# Altium PCB Copy of EV76C661_Motherboard.PcbDoc
Units mil, origin at the board's own origin, x right, y up, seen from the top; angles counter-clockwise.
Board outline 16800 x 9950 mil, 2 copper layers (Top Layer, Bottom Layer); 16 components, 26 nets, 147 pads, 6 vias.
Unrouted connection lines stored in the file: 44.
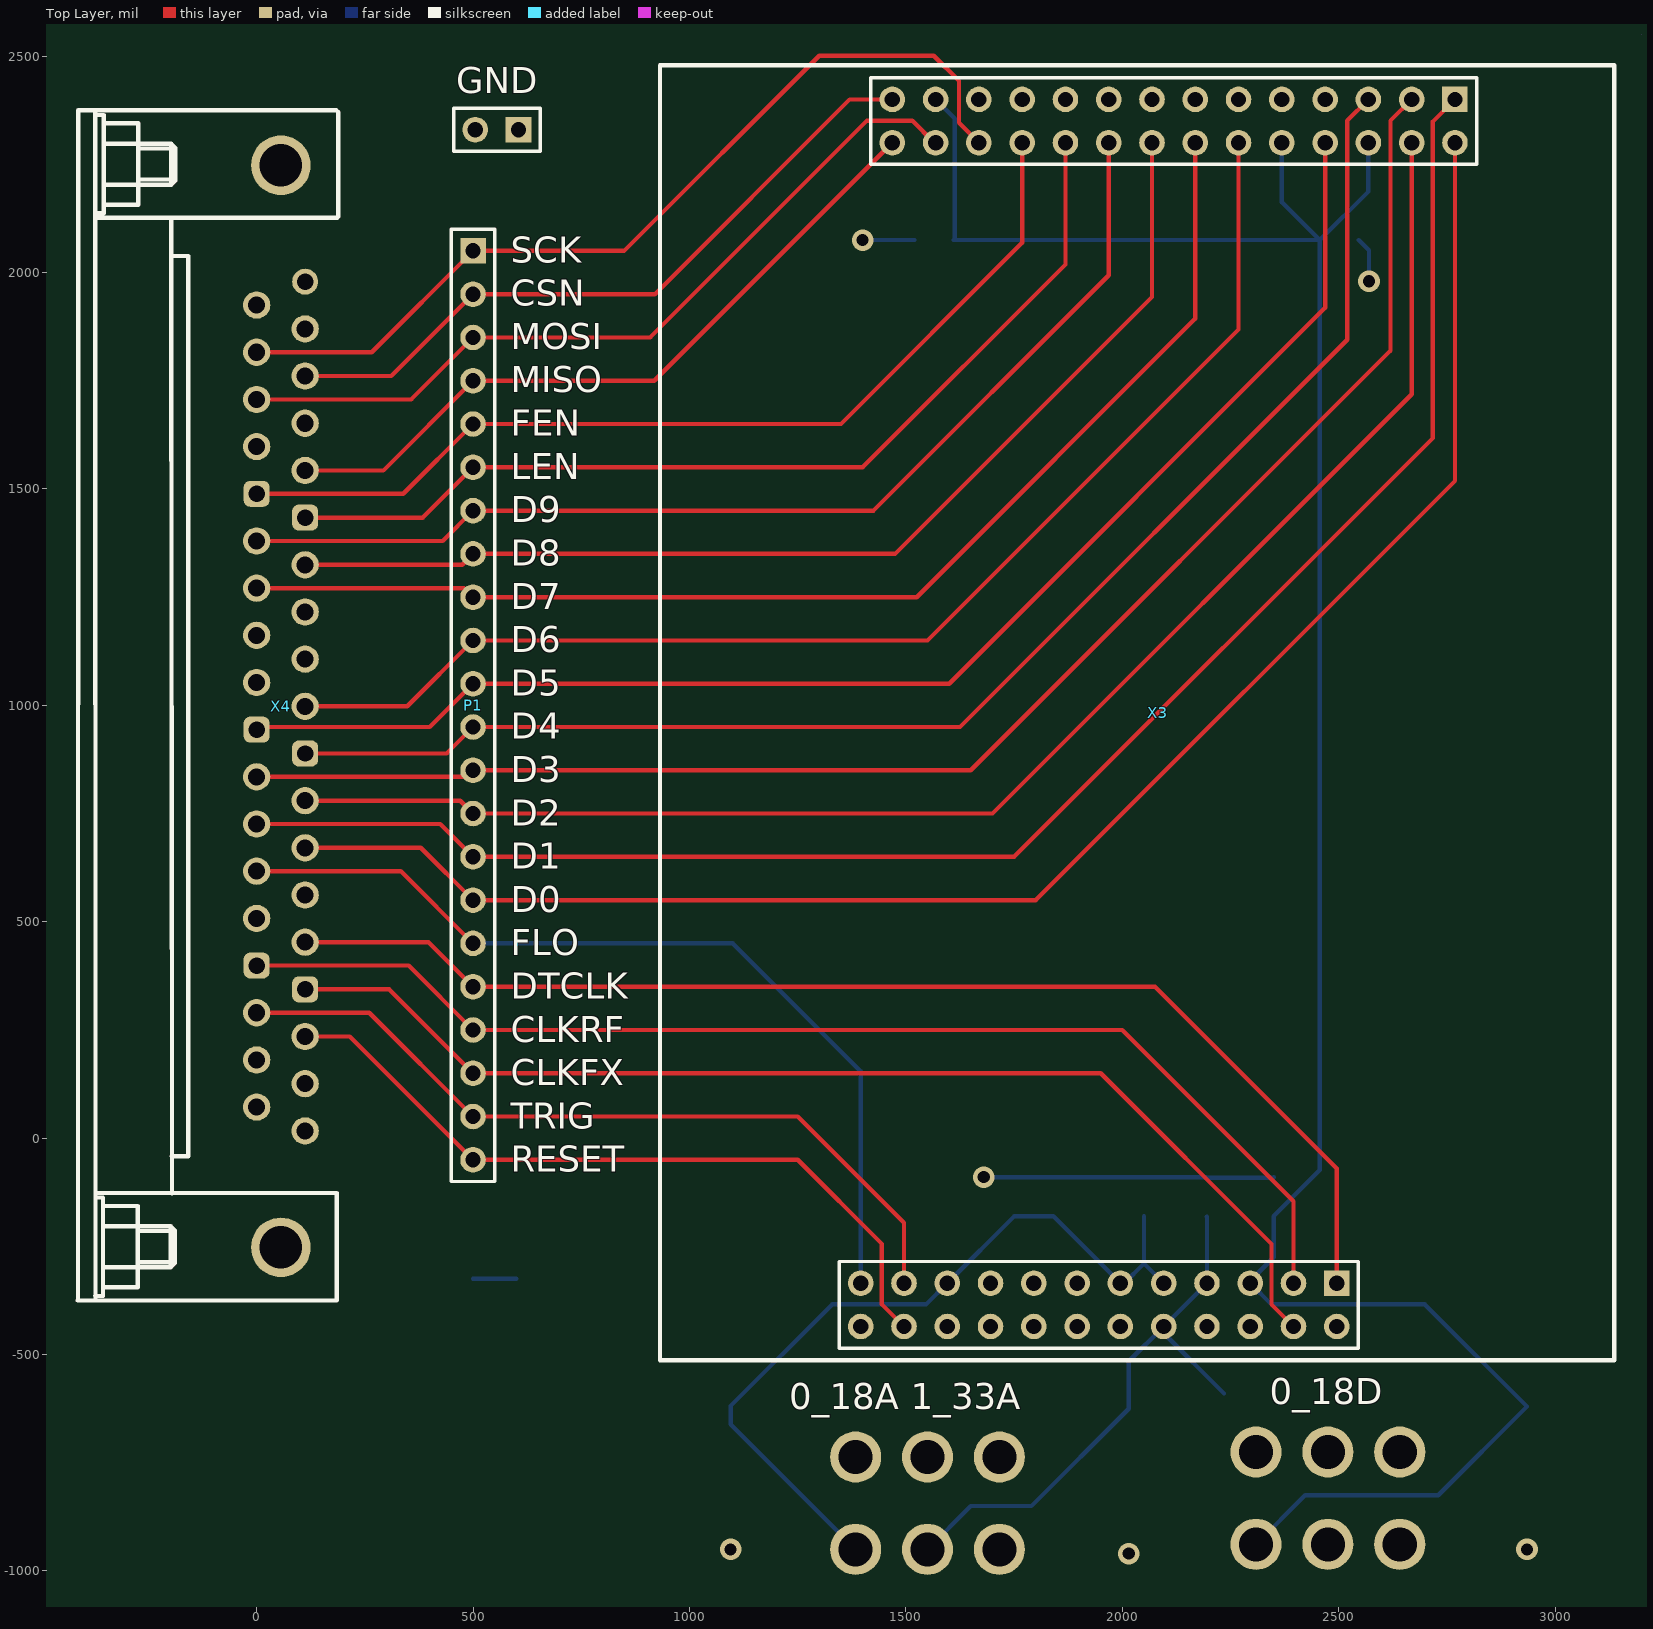
[diagram p0: Top Layer view]
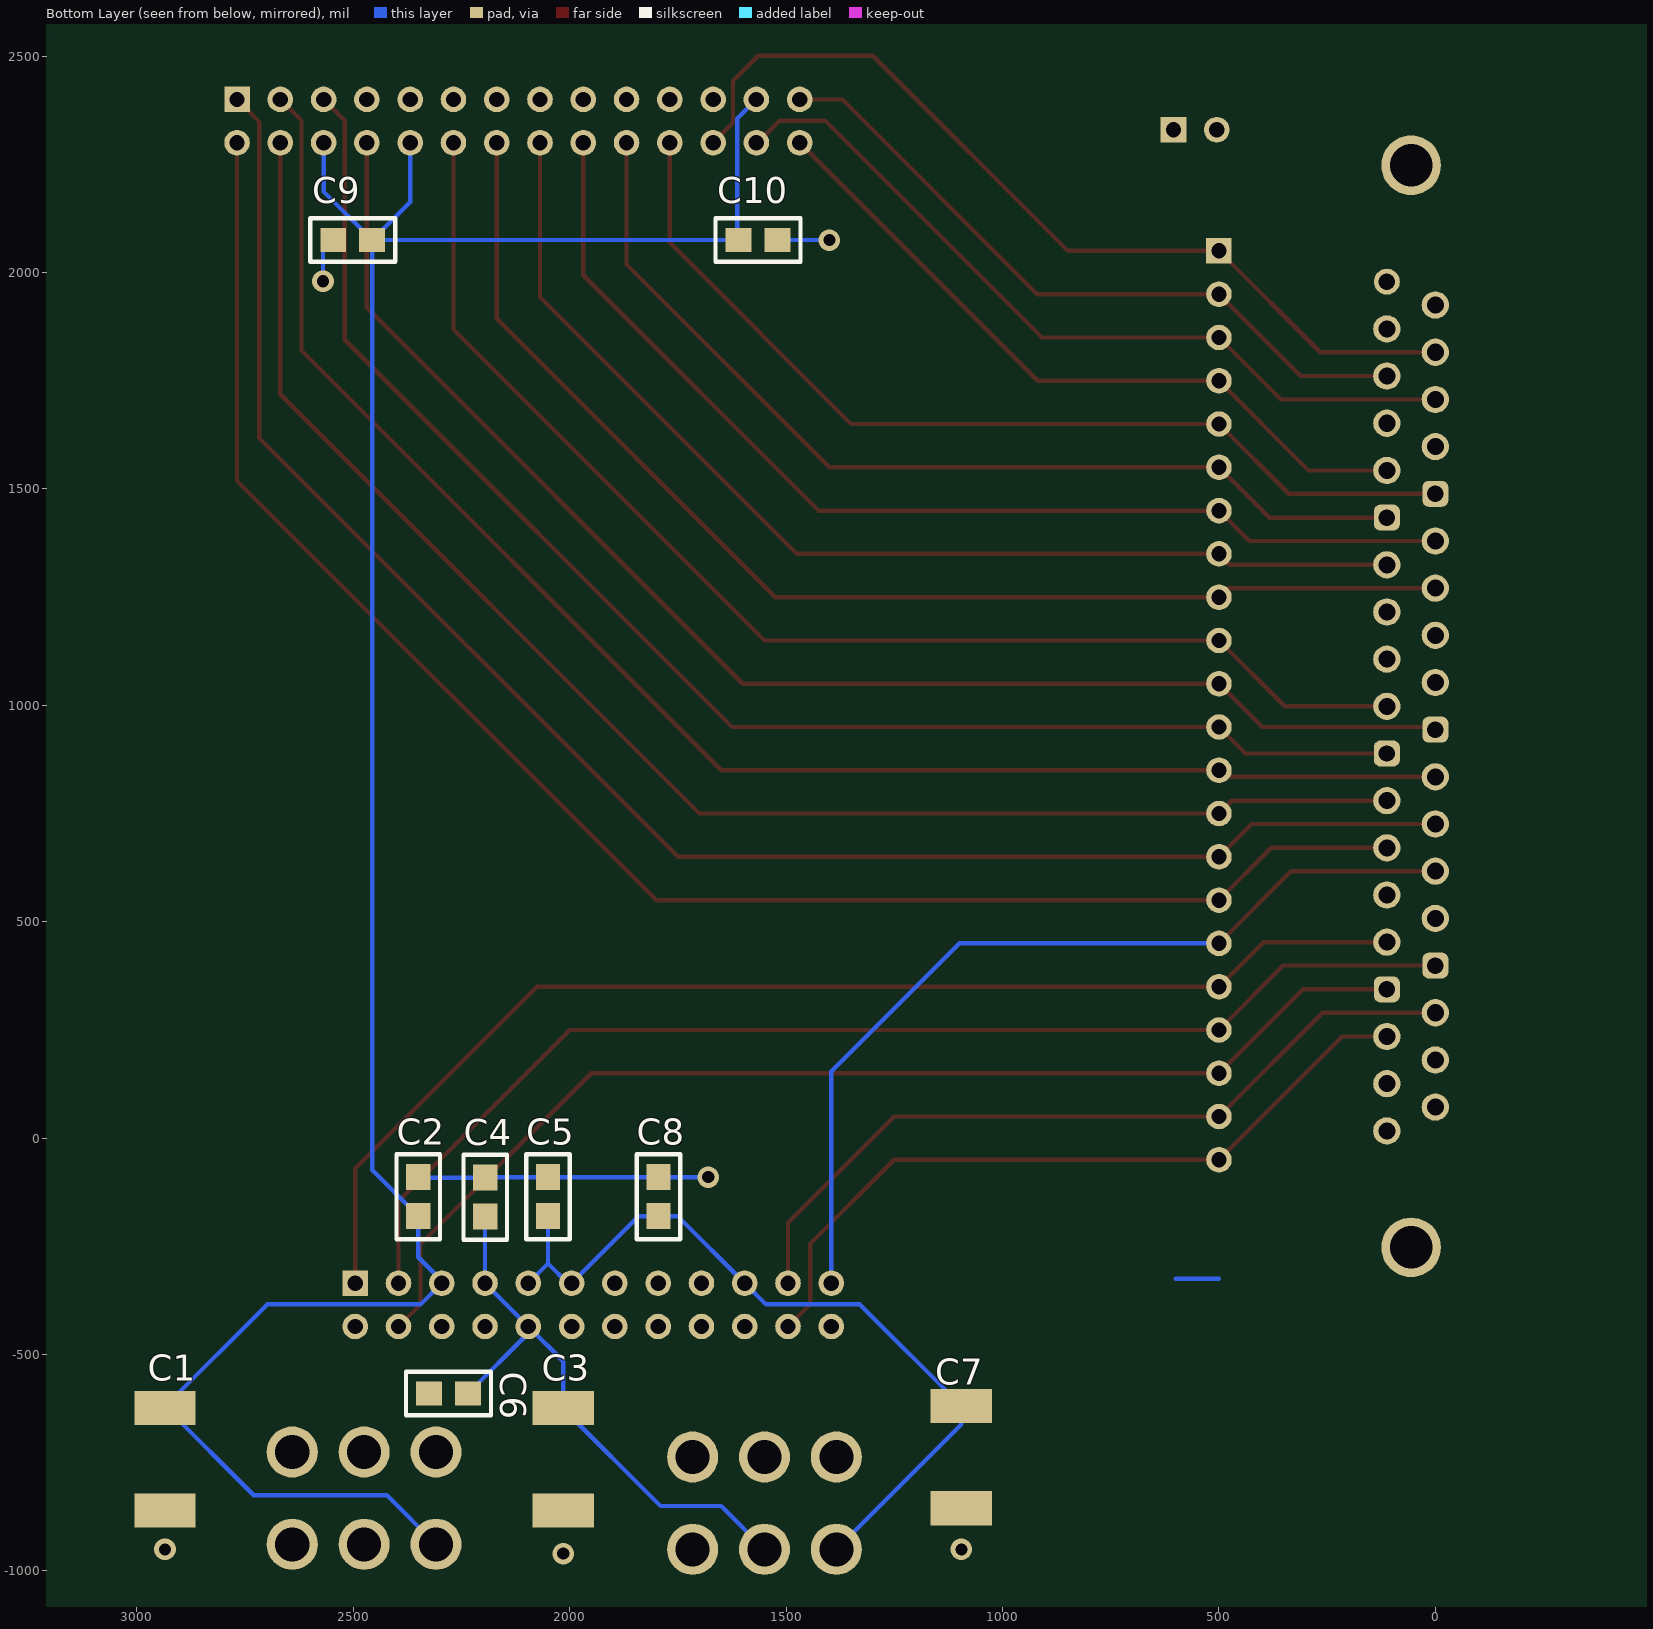
[diagram p1: Bottom Layer view, seen from below]

## Layer stack, top to bottom
Top Solder: solder mask 0.4, Solder Resist, Dk 3.5
Top Layer: signal copper 1.4
Dielectric 1: dielectric 12.6, FR-4, Dk 4.8
Bottom Layer: signal copper 1.4
Bottom Solder: solder mask 0.4, Solder Resist, Dk 3.5

## Board outline
-6750.39,-5179 10049.61,-5179 10049.61,4771 9999.61,4721 -6700.39,4721 -6750.39,4671
cut-out: 3200,2550

## Design rules (kind name [scope] priority, off if disabled: settings)
Clearance [All] p1: gap=10 ignorepadtopadclearanceinfootprint=FALSE except(0: Arc-Hole Track-Hole SMDPad-Hole THPad-Hole Via-Hole Fill-Hole Poly-Hole Region-Hole Text-Hole)
PolygonConnect [All] p1: connectstyle=Relief reliefconductorwidth=10 reliefentries=4 polygonreliefangle="90 Angle" airgapwidth=10
RoutingVias [All] p1: holewidth=28 width=50 viastyle="Through Hole" minholewidth=28 minwidth=50 maxholewidth=28 maxwidth=50
SolderMaskExpansion [All] p1: expansion=4
Width [All] p1: maxlimit=10 minlimit=10 preferedwidth=10
30 further rules are at their usual default settings.

## Components (designator, comment, footprint, x,y, rotation, side; value= is the part's Value field where it differs from the comment)
"0_18A 1_33A" "POWER" POWER 1550,-650 r180 top (schematic designator X1)
0_18D "POWER" POWER 2475,-638.48 r180 top (schematic designator X2)
C1 "10uF" Cap_BIG 2860,-580.78 r0 bottom
C2 "100nF" CAP_SMALL 2300,-233.71 r90 bottom
C3 "10uF" Cap_BIG 1940,-580.78 r0 bottom
C4 "100nF" CAP_SMALL 2145,-235 r90 bottom
C5 "100nF" CAP_SMALL 2100,-36.29 r270 bottom
C6 "100nF" CAP_SMALL 2181.29,-540 r0 bottom
C7 "10uF" Cap_BIG 1020,-575.78 r0 bottom
C8 "100nF" CAP_SMALL 1745,-233.71 r90 bottom
C9 "100nF" CAP_SMALL 2600,2025 r180 bottom
C10 "100nF" CAP_SMALL 1466.29,2125 r0 bottom
GND "Header 2" HDR1X2 605,2330 r180 top (schematic designator P3)
P1 "Header 22" HDR1X22 500,2050 r270 top
X3 "EV76_MEZ" EV76C661_MEZONINE 2495.61,-435 r90 top
X4 "CHEAP_CON_37_FEMALE" CHEAP_CONN_FEMALE 56,-252.18 r90 top

## Footprints (in the part's own frame and the unit in brackets; to place one, negate y for a bottom-side part, rotate by r counter-clockwise, add the part's x,y. Pads: shape width x height; smd on the part's side, far side on the other; paste and mask are expansions set on the pad)
Cap_BIG [mm] "FROM_MAX"
  rect 3.6x2 smd: 1(1.905,7.092) 2(1.905,1.092)
  body extent 0,-0.01 3.81,8.19, height 2.54
CAP_SMALL [mil] "FROM_MAX"
  rect 60x55.98 smd: 1(53.71,50) 2(143.71,50)
  silkscreen extent 1,0 197,100, body extent 20,18 178,82, height 100
CHEAP_CONN_FEMALE [mm] "CHEAP_CONN_FEMALE"
  round 1.6 hole 1: 1(6.833,-1.422) 2(9.601,-1.422) 3(12.37,-1.422) 5(17.907,-1.422) 6(20.676,-1.422) 7(23.444,-1.422) 8(26.213,-1.422) 10(31.75,-1.422) 11(34.519,-1.422) 12(37.287,-1.422) 13(40.056,-1.422) 15(45.593,-1.422) 16(48.362,-1.422) 17(51.13,-1.422) 18(53.899,-1.422) 20(8.23,1.422) 21(10.998,1.422) 22(13.767,1.422) 24(19.304,1.422) 25(22.073,1.422) 26(24.841,1.422) 27(27.61,1.422) 29(33.147,1.422) 30(35.916,1.422) 31(38.684,1.422) 32(41.453,1.422) 34(46.99,1.422) 35(49.759,1.422) 36(52.527,1.422) 37(55.296,1.422)
  rrect50% 1.524x1.524 hole 0.965: 4(15.138,-1.422) 9(28.981,-1.422) 14(42.824,-1.422) 23(16.535,1.422) 28(30.378,1.422) 33(44.221,1.422)
  round 1.524 hole 0.965: 19(56.667,-1.422)
  round 3.5 hole 2.5: 38(0,0) 39(63.5,0)
  silkscreen extent -3.11,-3.36 66.72,11.92
EV76C661_MEZONINE [mm]
  rect 1.5x1.5 hole 0.9: 1(2.54,0) 25(72.009,-6.934)
  round 1.5 hole 0.9: 2(0,0) 3(2.54,2.54) 4(0,2.54) 5(2.54,5.08) 6(0,5.08) 7(2.54,7.62) 8(0,7.62) 9(2.54,10.16) 10(0,10.16) 11(2.54,12.7) 12(0,12.7) 13(2.54,15.24) 14(0,15.24) 15(2.54,17.78) 16(0,17.78) 17(2.54,20.32) 18(0,20.32) 19(2.54,22.86) 20(0,22.86) 21(2.54,25.4) 22(0,25.4) 23(2.54,27.94) 24(0,27.94) 26(72.009,-4.394) 27(72.009,-1.854) 28(72.009,0.686) 29(72.009,3.226) 30(72.009,5.766) 31(72.009,8.306) 32(72.009,10.846) 33(72.009,13.386) 34(72.009,15.926) 35(72.009,18.466) 36(72.009,21.006) 37(72.009,23.546) 38(72.009,26.086) 39(69.469,-6.934) 40(69.469,-4.394) 41(69.469,-1.854) 42(69.469,0.686) 43(69.469,3.226) 44(69.469,5.766) 45(69.469,8.306) 46(69.469,10.846) 47(69.469,13.386) 48(69.469,15.926) 49(69.469,18.466) 50(69.469,21.006) 51(69.469,23.546) 52(69.469,26.086)
  silkscreen extent -1.99,-16.28 74.01,39.72
HDR1X2 [mm] "Connector; Header; 2 Position"
  rect 1.5x1.5 hole 0.9: 1(0,0)
  round 1.5 hole 0.9: 2(2.54,0)
  silkscreen extent -1.27,-1.27 3.81,1.27
HDR1X22 [mm] "Connector; Header; 22 Position"
  rect 1.5x1.5 hole 0.9: 1(0,0)
  round 1.5 hole 0.9: 2(2.54,0) 3(5.08,0) 4(7.62,0) 5(10.16,0) 6(12.7,0) 7(15.24,0) 8(17.78,0) 9(20.32,0) 10(22.86,0) 11(25.4,0) 12(27.94,0) 13(30.48,0) 14(33.02,0) 15(35.56,0) 16(38.1,0) 17(40.64,0) 18(43.18,0) 19(45.72,0) 20(48.26,0) 21(50.8,0) 22(53.34,0)
  silkscreen extent -1.27,-1.27 54.61,1.27
POWER [mm] "POWER"
  round 3 hole 2: 1(4.217,7.62) 2(0,7.62) 3(-4.217,7.62) 4(4.217,2.198) 5(0,2.198) 6(-4.217,2.198)

## Part data
C1 C3 C7: library part CAP_BIG
C2 C4 C5 C6 C8 C9 C10: library part CAP_SMALL
GND: "Header, 2-Pin", LatestRevisionDate=17-Jul-2002, LatestRevisionNote="Re-released for DXP Platform.", Publisher="Altium Limited"
P1: "Header, 22-Pin", LatestRevisionDate=17-Jul-2002, LatestRevisionNote="Re-released for DXP Platform.", Publisher="Altium Limited"
X3: library part EV76C661_MEZ

## Via types
v1: diameter 50, hole 28, Top Layer to Bottom Layer, 6 vias

## Nets (pads, with @x,y where several pads share a name; then routed paths per layer and width w, separated by ;. In a path a pad name is that pad's centre, name@x,y a point inside that pad or via, vN(x,y) a via of type N, cw(c..) or ccw(c..) an arc to the next point about the centre after c; other vN are vias at no path point)
CLKFIX: P1.20 X3.4 X4.4 | length 2687.9
  Top Layer w10: X4.4 306.18,343.82 P1.20 1950,150 2344.61,-244.61 2344.61,-384 X3.4
CLKREF: P1.19 X3.3 X4.23 | length 2810.5
  Top Layer w10: X4.23 351.18,398.82 P1.19 2000,250 2395.61,-145.61 X3.3
CSN: P1.2 X3.38 X4.17 | length 1621.4
  Top Layer w10: X4.17 310.82,1760.82 P1.2 920,1950 1370,2400 X3.38
D0: P1.16 X3.39 X4.7 | length 3889.3
  Top Layer w10: X4.7 379.18,670.82 P1.16 1800,550 2768.61,1518.61 X3.39
D1: P1.15 X3.25 X4.26 | length 3953.3
  Top Layer w10: X4.26 424.18,725.82 P1.15 1750,650 2717.61,1617.61 2717.61,2349 X3.25
D2: P1.14 X3.40 X4.8 | length 3551.6
  Top Layer w10: X4.8 470.18,779.82 P1.14 1700,750 2668.61,1718.61 X3.40
D3: P1.13 X3.26 X4.27 | length 3628.2
  Top Layer w10: X4.27 484.82,834.82 P1.13 1650,850 2619.61,1819.61 2619.61,2351 X3.26
D4: P1.12 X3.27 X4.9 | length 3379.2
  Top Layer w10: X4.9 438.82,888.82 P1.12 1625,950 2519.61,1844.61 2519.61,2351 X3.27
D5: P1.11 X3.42 X4.28 | length 3253.8
  Top Layer w10: X4.28 6.18,950 400,950 P1.11 1600,1050 2468.61,1918.61 X3.42
D6: P1.10 X3.44 X4.10 | length 2948.7
  Top Layer w10: X4.10 347.82,997.82 P1.10 1550,1150 2268.61,1868.61 X3.44
D7: P1.9 X3.45 X4.31 | length 2850.2
  Top Layer w10: X4.31 479.18,1270.82 P1.9 1525,1250 2168.61,1893.61 X3.45
D8: P1.8 X3.46 X4.13 | length 2569.3
  Top Layer w10: X4.13 474.82,1324.82 P1.8 1475,1350 2068.61,1943.61 X3.46
D9: P1.7 X3.47 X4.32 | length 2529.2
  Top Layer w10: X4.32 429.82,1379.82 P1.7 1425,1450 1968.61,1993.61 X3.47
DATACLK: P1.18 X3.1 X4.5 | length 2865.2
  Top Layer w10: X4.5 397.18,452.82 P1.18 2075.61,350 2495.61,-70 X3.1
FEN: P1.5 X3.49 X4.33 | length 2240.2
  Top Layer w10: X4.33 338.82,1488.82 P1.5 1350,1650 1768.61,2068.61 X3.49
FLO: P1.17 X3.23 X4.25 | length 2076.5
  Top Layer w10: X4.25 333.18,616.82 P1.17
  Bottom Layer w10: P1.17 1100,450 1395.61,154.39 X3.23
GND: 0_18D.4 0_18D.5 0_18D.6 "0_18A 1_33A.4" "0_18A 1_33A.5" "0_18A 1_33A.6" C1.1 C2.2 C3.1 C4.2 C5.1 C6.2 C7.1 C8.2 C9.1 C10.1 GND.1 GND.2 X3.2 X3.6 X3.8 X3.12 X3.13 X3.14 X3.15 X3.16 X3.17 X3.18 X3.20 X3.24 X3.28 X3.29 X3.30 X3.31 X3.32 X3.33 X3.34 X3.35 X3.36 X4.6 X4.11 X4.16 X4.24 X4.29 X4.34 X4.38 X4.39 | length 995.9
  Bottom Layer w10: 500,-325 600,-325 ; v1(1400,2075) C10.1 ; v1(1680,-90) C8.2 C5.1 2193.71,-90 C4.2 2348.71,-91.29 C2.2 ; C9.1 2570,2051.29 v1(2570,1980)
LEN: P1.6 X3.48 X4.14 | length 2280.2
  Top Layer w10: X4.14 383.82,1433.82 P1.6 1400,1550 1868.61,2018.61 X3.48
MISO: P1.4 X3.52 X4.15 | length 1685.2
  Top Layer w10: X4.15 292.82,1542.82 P1.4 918.61,1750 X3.52 X3.52@1453.61,2300
MOSI: P1.3 X3.51 X4.35 | length 1856.6
  Top Layer w10: X4.35 356.82,1706.82 P1.3 909,1850 1410,2351 1514.61,2351 1565.61,2300 X3.51
RESET: P1.22 X3.22 X4.3 | length 1742.7
  Top Layer w10: X4.3 215.18,234.82 P1.22 1250,-50 1444.61,-244.61 1444.61,-384 X3.22
SCK: P1.1 X3.50 X4.36 | length 2092.5
  Top Layer w10: X4.36 265.82,1815.82 P1.1 848.61,2050 1299.61,2501 1564.61,2501 1622.61,2443 1622.61,2346 X3.50
TRIG: P1.21 X3.21 X4.22 | length 1836.1
  Top Layer w10: X4.22 260.18,289.82 P1.21 1250,50 1495.61,-195.61 X3.21
VDD1: 0_18D.1 C1.2 C2.1 C9.2 C10.2 X3.5 X3.37 X3.41 X3.43 | length 5715.8
  Bottom Layer w10: X3.37 1613.13,2355.47 1613.13,2078.13 C10.2 C9.2 ; 0_18D.1 2422.44,-825 2730,-825 2935,-620 2699,-384 2344.61,-384 X3.5 2295.61,-329.39 2350,-275 C2.1 2456.29,-73.71 C9.2 ; X3.43 2368.61,2162.68 C9.2 ; X3.41 2568.61,2187.32 C9.2
VDD2: "0_18A 1_33A.2" C3.2 C4.1 C6.1 X3.7 X3.10 | length 1331.1
  Bottom Layer w10: 1550,-950 1650,-850 1790,-850 2015,-625 2015,-515.61 X3.10 ; C4.1 2195.61,-181.9 X3.7 X3.10 ; C6.1 2095.61,-450.61 X3.10
VDD3: "0_18A 1_33A.1" C5.2 C7.2 C8.1 X3.9 X3.11 X3.19 | length 1844.6
  Bottom Layer w10: 1383.96,-950 1095,-661.04 C7.2 1329.78,-384 1546.61,-384 X3.19 1750.61,-180 C8.1 1840.61,-180 X3.11 2004.39,-335 2050,-289.39 ; C5.2 2050,-289.39 ; X3.9 2050,-289.39
pads on no net: 0_18D.2 0_18D.3 "0_18A 1_33A.3" X4.1 X4.2 X4.12 X4.18 X4.19 X4.20 X4.21 X4.30 X4.37
copper on no net:
  other v1: 2015,-960 1095,-950 2935,-950

## Silkscreen, mask and mechanical layers (free items; w line width, h text height)
Top Overlay:
  text "SCK" at 587,2023 h60
  text "CSN" at 587,1922.95 h60
  text "MOSI" at 587,1822.9 h60
  text "MISO" at 587,1722.85 h60
  text "FEN" at 587,1622.81 h60
  text "LEN" at 587,1522.76 h60
  text "D9" at 587,1422.71 h60
  text "D8" at 587,1322.66 h60
  text "D7" at 587,1222.62 h60
  text "D6" at 587,1122.57 h60
  text "D5" at 587,1022.52 h60
  text "D4" at 587,922.48 h60
  text "D3" at 587,822.43 h60
  text "D2" at 587,722.38 h60
  text "D1" at 587,622.33 h60
  text "D0" at 587,522.28 h60
  text "FLO" at 587,422.24 h60
  text "DTCLK" at 587,322.19 h60
  text "CLKRF" at 587,222.14 h60
  text "CLKFX" at 587,122.1 h60
  text "TRIG" at 587,22.05 h60
  text "RESET" at 587,-78 h60
Drill Drawing:
  lines w19.68: -6750.39,-5179 10049.61,-5179 10049.61,4771 9999.61,4721 -6700.39,4721 -6750.39,4671